# EAGLE board Eshaan - DIYpiano (EAGLE 9.2.2)
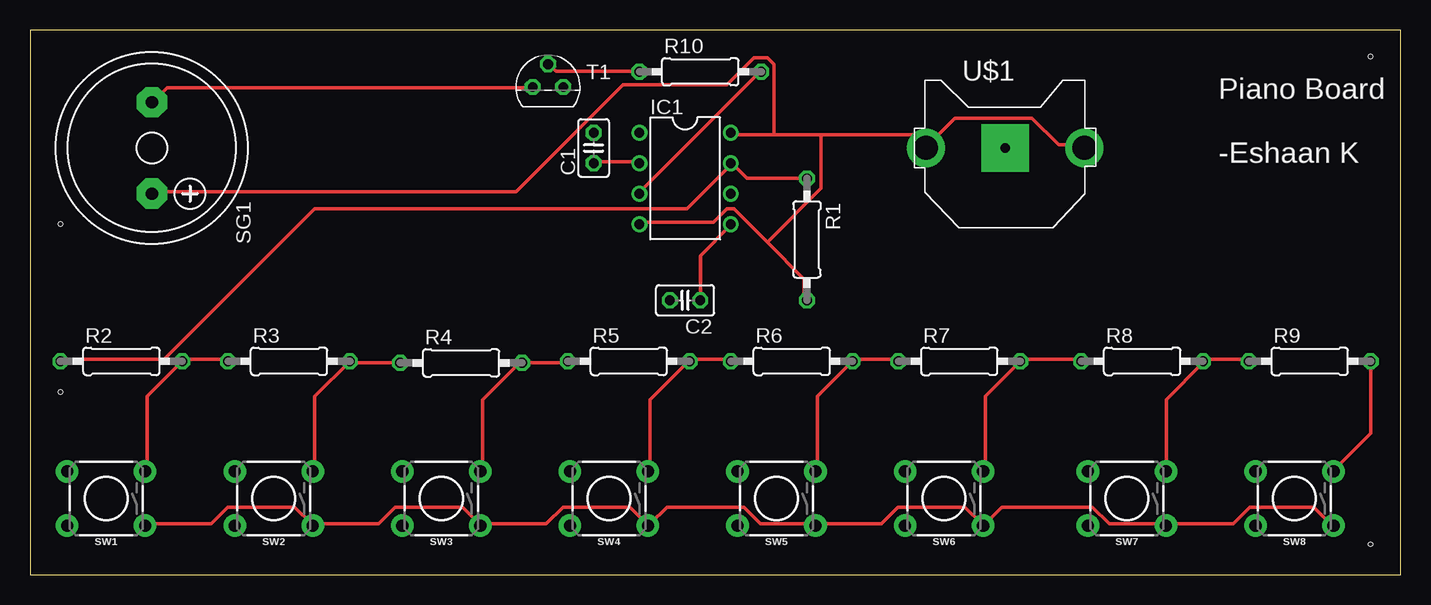
[diagram p0: board, top side]
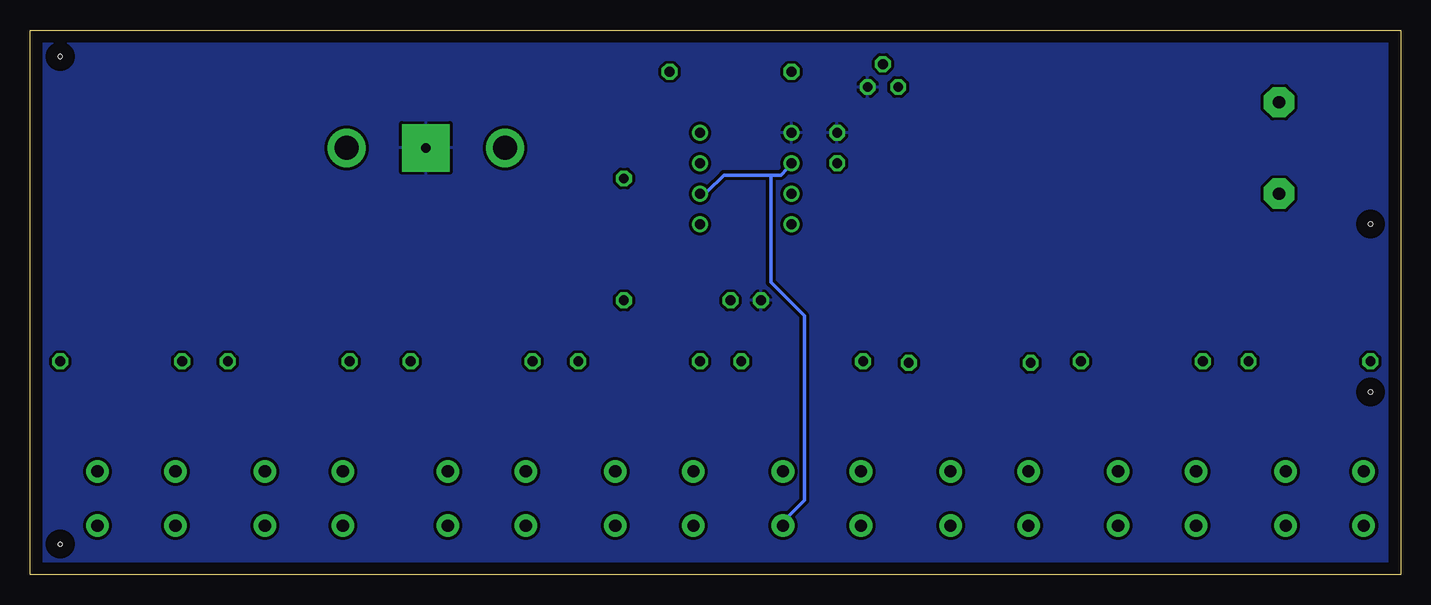
[diagram p1: board, bottom side, seen from below]

Size 114.28 x 45.39 mm. Coordinates in mm from the lower left corner, seen from the top.
Outline: 0,0 114.28,0 114.28,45.39 0,45.39 0,0
Copper layers (1*16): Top 0.035mm / dielectric 1.5mm / Bottom 0.035mm
Design rules "default": minimum track width 6mil, minimum drill 0.35mm, track to track 6mil, track to pad 6mil, pad to pad 6mil, via to via 6mil, smd to smd 6mil, copper to edge 40mil, drill to drill 6mil, minimum pad ring 10mil, minimum via ring 8mil, stop-mask expansion 4mil, vias tented up to drill 0mil, thermal gap 10mil
Net classes: 0 default: width 0.305 mm, drill 0.508 mm, clearance 0.254 mm
Holes 0.35 mm at 111.76,43.18 111.76,2.54 2.54,29.21 2.54,15.24

## Footprints (pad centres in the part's own frame; a part is rotated, then mirrored left to right if it is on the bottom)
C025-025X050 = drill 0.813 octagon: 1 -1.27,0; 2 1.27,0
DIL08 = drill 0.813 pad 1.27: 1 -3.81,-3.81; 2 -1.27,-3.81; 3 1.27,-3.81; 4 3.81,-3.81; 5 3.81,3.81; 6 1.27,3.81; 7 -1.27,3.81; 8 -3.81,3.81
0207/10 = drill 0.813 octagon: 1 -5.08,0; 2 5.08,0
F/HMB = drill 1.016 pad 2.54 octagon: + 3.81,0; - -3.81,0
TACTILE_SWITCH_PTH_6.0MM = drill 1.016 pad 1.88: 1 -3.251,2.261; 2 3.251,2.261; 3 -3.251,-2.261; 4 3.251,-2.261
TO92 = drill 0.813 octagon: 1 1.27,0; 2 0,1.905; 3 -1.27,0
CR1220-THM = drill 2 pad 3.175: +1 -6.604,0; +2 6.604,0 | drill 0.8 pad 3.962 square: - 0,0

## Placement (x,y rotation side)
C1  100n  [C025-025X050]  46.99,35.56 90 top
C2  100nF  [C025-025X050]  54.61,22.86 180 top
IC1  NE555N  [DIL08]  54.61,33.02 270 top
R1  1K  [0207/10]  64.77,27.94 270 top
R2  6.2K  [0207/10]  7.62,17.78 0 top
R3  390  [0207/10]  21.59,17.78 0 top
R4  910  [0207/10]  35.94,17.65 0 top
R5  1K  [0207/10]  49.91,17.78 0 top
R6  1.1K  [0207/10]  63.5,17.78 0 top
R7  620  [0207/10]  77.47,17.78 0 top
R8  1.3K  [0207/10]  92.71,17.78 0 top
R9  1.5K  [0207/10]  106.68,17.78 0 top
R10  1K  [0207/10]  55.88,41.91 0 top
SG1  F/HMB  [F/HMB]  10.16,35.56 270 top
SW1  MOMENTARY-SWITCH-SPST-PTH-6.0MM  [TACTILE_SWITCH_PTH_6.0MM]  6.35,6.35 180 top
SW2  MOMENTARY-SWITCH-SPST-PTH-6.0MM  [TACTILE_SWITCH_PTH_6.0MM]  20.32,6.35 180 top
SW3  MOMENTARY-SWITCH-SPST-PTH-6.0MM  [TACTILE_SWITCH_PTH_6.0MM]  34.29,6.35 180 top
SW4  MOMENTARY-SWITCH-SPST-PTH-6.0MM  [TACTILE_SWITCH_PTH_6.0MM]  48.26,6.35 180 top
SW5  MOMENTARY-SWITCH-SPST-PTH-6.0MM  [TACTILE_SWITCH_PTH_6.0MM]  62.23,6.35 180 top
SW6  MOMENTARY-SWITCH-SPST-PTH-6.0MM  [TACTILE_SWITCH_PTH_6.0MM]  76.2,6.35 180 top
SW7  MOMENTARY-SWITCH-SPST-PTH-6.0MM  [TACTILE_SWITCH_PTH_6.0MM]  91.44,6.35 180 top
SW8  MOMENTARY-SWITCH-SPST-PTH-6.0MM  [TACTILE_SWITCH_PTH_6.0MM]  105.41,6.35 180 top
T1  [TO92]  43.18,40.64 0 top
U$1  [CR1220-THM]  81.28,35.56 0 top

## Library data of the parts
C1 C2 = rcl; OC_NEWARK: unknown; SPICEPREFIX: C
IC1 = linear; OC_NEWARK: unknown
R1-R10 = rcl; OC_NEWARK: unknown; SPICEPREFIX: R
SG1 = buzzer; OC_FARNELL: unknown; OC_NEWARK: unknown
SW1-SW8 = SparkFun-Switches; OC_NEWARK: unknown; PROD_ID: SWCH-08441; SF_SKU: COM-00097
T1 = transistor
U$1 = adafruit

## Nets
GND: C1.2 C2.2 IC1.1 T1.1 U$1.-
N$1: R2.2 R3.1 SW1.3
N$2: IC1.7 R1.1 R2.1
N$3: C1.1 IC1.2 IC1.6 SW1.1 SW2.1 SW3.1 SW4.1 SW5.1 SW6.1 SW7.1 SW8.1
N$4: R3.2 R4.1 SW2.3
N$5: R4.2 R5.1 SW3.3
N$6: R5.2 R6.1 SW4.3
N$7: R6.2 R7.1 SW5.3
N$8: R7.2 R8.1 SW6.3
N$9: R8.2 R9.1 SW7.3
N$10: R9.2 SW8.3
N$11: IC1.3 R10.2
N$13: SG1.- T1.3
N$14: R10.1 T1.2
N$16: C2.1 IC1.5
VCC: IC1.4 IC1.8 R1.2 SG1.+ U$1.+1 U$1.+2

## Tracks (layer width: path | path; a pad name or v marks a point on that pad's centre or on a via)
GND
  pour Bottom: 0,45.72 114.3,45.72 114.3,-1.27 0,-1.27 0,44.45 -1.27,45.72
N$1
  Top 0.305: R3.1 16.48,17.93 12.85,17.93 R2.2 9.78,14.86 9.78,8.71 SW1.3
N$2
  Top 0.305: R2.1 2.79,17.93 11.18,17.93 23.75,30.51 54.76,30.51 58.4,34.14 IC1.7 58.67,34.14 59.79,33.02 R1.1
N$3
  Top 0.305: SW8.1 108.41,4.24 107.01,5.64 101.7,5.64 100.31,4.24 94.72,4.24 SW7.1 94.44,4.24 89.97,4.24 88.57,5.64 81.03,5.64 79.63,4.24 SW6.1 79.35,4.24 77.95,5.64 72.36,5.64 70.97,4.24 65.66,4.24 SW5.1 65.38,4.24 60.91,4.24 59.51,5.64 53.09,5.64 51.69,4.24 SW4.1 51.41,4.24 50.01,5.64 44.42,5.64 43.03,4.24 37.72,4.24 SW3.1 37.44,4.24 36.04,5.64 30.45,5.64 29.06,4.24 23.75,4.24 SW2.1 23.47,4.24 22.07,5.64 16.48,5.64 15.09,4.24 9.78,4.24 SW1.1 | C1.1 47.22,34.42 50.57,34.42 IC1.2
  Bottom 0.305: 52.53,33.3 51.69,33.3 51.13,33.86 50.85,33.86 50.57,34.14 IC1.2 | 52.53,33.3 56.44,33.3 57.84,31.9 58.4,31.9 IC1.6 | 52.53,33.3 52.53,24.36 49.73,21.56 49.73,6.2 51.69,4.24 SW4.1
N$4
  Top 0.305: R4.1 26.82,17.65 R3.2 23.75,14.86 23.75,8.71 SW2.3
N$5
  Top 0.305: R5.1 44.7,17.65 R4.2 40.79,17.65 37.72,14.58 37.72,8.71 SW3.3
N$6
  Top 0.305: R6.1 58.4,17.93 55.04,17.93 R5.2 54.76,17.65 51.69,14.58 51.69,8.71 SW4.3
N$7
  Top 0.305: R7.1 72.36,17.93 68.73,17.93 R6.2 65.66,14.86 65.66,8.71 SW5.3
N$8
  Top 0.305: R8.1 87.45,17.93 82.7,17.93 R7.2 79.63,14.86 79.63,8.71 SW6.3
N$9
  Top 0.305: R9.1 101.42,17.93 97.79,17.93 R8.2 97.79,17.65 94.72,14.58 94.72,8.71 SW7.3
N$10
  Top 0.305: R9.2 111.76,11.79 108.69,8.71 SW8.3
N$11
  Top 0.305: IC1.3 50.85,31.9 60.91,41.96 R10.2
N$13
  Top 0.305: T1.3 41.91,40.56 11.46,40.56 10.34,39.45 SG1.-
N$14
  Top 0.305: R10.1 50.57,41.96 43.87,41.96 43.31,42.52 T1.2
N$16
  Top 0.305: C2.1 55.88,26.59 58.4,29.11 IC1.5
VCC
  Top 0.305: 61.47,27.71 64.54,24.64 64.54,22.96 R1.2 | 61.47,27.71 58.67,30.51 58.12,30.51 57,29.39 50.85,29.39 IC1.4 | 65.94,36.65 73.76,36.65 74.6,35.81 U$1.+1 74.88,35.81 77.11,38.05 83.54,38.05 85.78,35.81 87.73,35.81 U$1.+2 | 65.94,36.65 62.03,36.65 | 62.03,36.65 58.67,36.65 IC1.8 | 62.03,36.65 62.03,42.52 61.47,43.08 60.35,43.08 58.12,40.84 49.45,40.84 40.51,31.9 10.34,31.9 SG1.+ | 61.47,27.71 65.94,32.18 65.94,36.65

## Text on the board
tPlace: Piano Board / / -Eshaan K